# Altium PCB PD_PCB.PcbDoc
Units mm, origin at the board's own origin, x right, y up, seen from the top; angles counter-clockwise.
Board outline 60.05 x 60 mm, 2 copper layers (Top Layer, Bottom Layer); 42 components, 23 nets, 142 pads, 0 vias.
Unrouted connection lines stored in the file: 90.
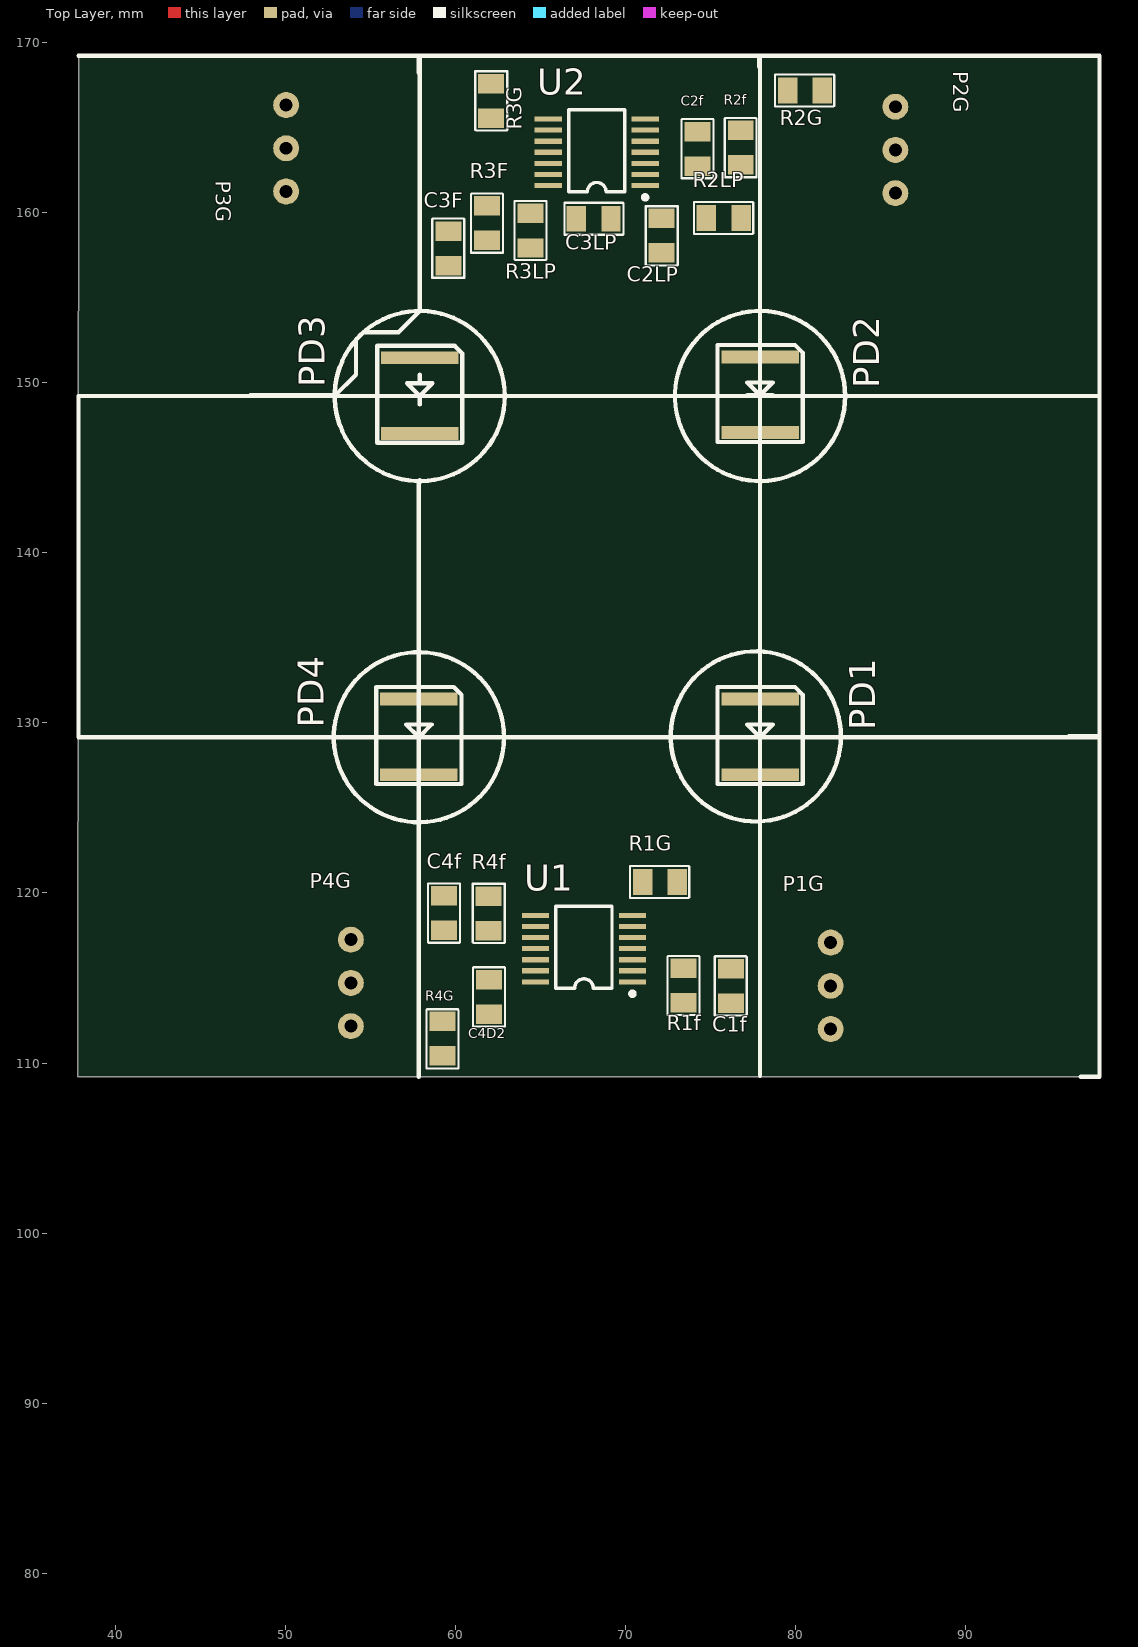
[diagram p0: Top Layer view]
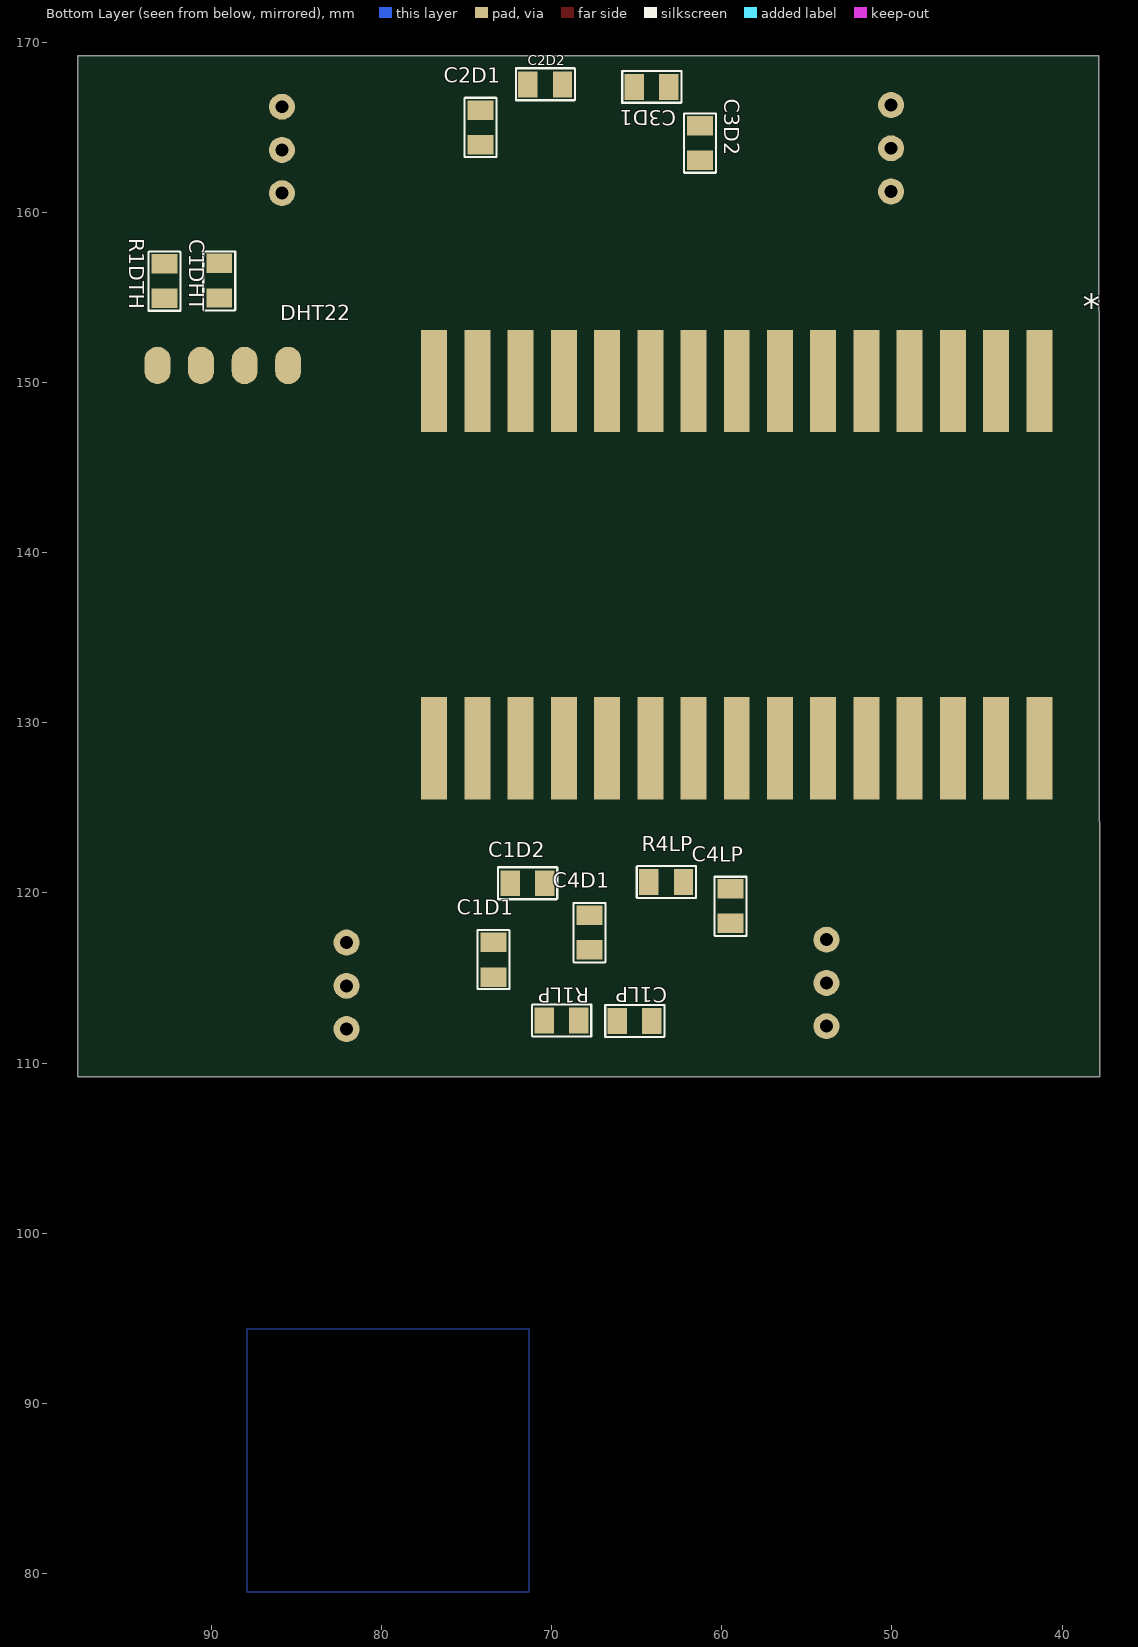
[diagram p1: Bottom Layer view, seen from below]

## Layer stack, top to bottom
Top Solder: solder mask 0.0102, Solder Resist, Dk 3.5
Top Layer: signal copper 0.0356
Dielectric 1: dielectric 0.32, FR-4, Dk 4.8
Bottom Layer: signal copper 0.0356
Bottom Solder: solder mask 0.0102, Solder Resist, Dk 3.5

## Board outline
37.85,169.2 97.85,169.2 97.85,109.2 37.8,109.2

## Design rules (kind name [scope] priority, off if disabled: settings)
Clearance [All] p1: gap=0.254 ignorepadtopadclearanceinfootprint=FALSE except(0: Arc-Hole Track-Hole SMDPad-Hole THPad-Hole Via-Hole Fill-Hole Poly-Hole Region-Hole Text-Hole)
PolygonConnect [All] p1: connectstyle=Relief reliefconductorwidth=0.254 reliefentries=4 polygonreliefangle="90 Angle" airgapwidth=0.254
RoomDefinition Sheet1 [InComponentClass('Sheet1')] p1: confinementstyle=ConfineIn formatcopy=TRUE lockcomponents=FALSE outline 0,0 50.8,0 50.8,25.4 0,25.4
RoomDefinition photodiodeAmplifier [InComponentClass('photodiodeAmplifier')] p2: confinementstyle=ConfineIn formatcopy=TRUE lockcomponents=FALSE outline 0,0 50.8,0 50.8,25.4 0,25.4
RoutingVias [All] p1: holewidth=0.711 width=1.27 viastyle="Through Hole" minholewidth=0.711 minwidth=1.27 maxholewidth=0.711 maxwidth=1.27
SolderMaskExpansion [All] p1: expansion=0.102 istentingtop=FALSE
Width [All] p1: maxlimit=0.254 minlimit=0.254 preferedwidth=0.254
30 further rules are at their usual default settings.

## Classes and differential pairs
component class Sheet1: * C1DHT DHT22 R1DTH
component class photodiodeAmplifier: C1D1 C1D2 C1f C1LP C2D1 C2D2 C2f C2LP C3D1 C3D2 C3F C3LP C4D1 C4D2 C4f C4LP P1G P2G P3G P4G PD1 PD2 PD3 PD4 R1f R1G R1LP R2f R2G R2LP R3F R3G R3LP R4f R4G R4LP U1 U2

## Components (designator, comment, footprint, x,y, rotation, side; value= is the part's Value field where it differs from the comment)
* "Arduino_Nano" "Arduino Nano SMD" 76.9,129.77 r90 bottom
C1D1 "100 nF" "CAP 0805" 73.6,115.95 r90 bottom value="5 pF"
C1D2 "100 nF" "CAP 0805" 71.55,120.75 r180 bottom value="5 pF"
C1DHT "100 nF" "CAP 0805" 89.35,156.1 r270 bottom value="5 pF"
C1f "100 nF" "CAP 0805" 76,114.4 r90 top value="5 pF"
C1LP "100 nF" "CAP 0805" 65.25,112.65 r180 bottom value="5 pF"
C2D1 "100 nF" "CAP 0805" 74.35,164.85 r90 bottom value="5 pF"
C2D2 "100 nF" "CAP 0805" 70.5,167.7 r180 bottom value="5 pF"
C2f "100 nF" "CAP 0805" 74.05,163.6 r90 top value="5 pF"
C2LP "100 nF" "CAP 0805" 72.3,158.75 r270 top value="5 pF"
C3D1 "100 nF" "CAP 0805" 64.25,167.55 r180 bottom value="5 pF"
C3D2 "100 nF" "CAP 0805" 61.1,164.2 r270 bottom value="5 pF"
C3F "100 nF" "CAP 0805" 59.4,157.75 r90 top value="5 pF"
C3LP "100 nF" "CAP 0805" 68,159.8 r0 top value="5 pF"
C4D1 "100 nF" "CAP 0805" 67.6,117.8 r270 bottom value="5 pF"
C4D2 "100 nF" "CAP 0805" 61.8,113.75 r90 top value="5 pF"
C4f "100 nF" "CAP 0805" 59.5,118.95 r270 top value="5 pF"
C4LP "100 nF" "CAP 0805" 59.3,119.35 r270 bottom value="5 pF"
DHT22 "DHT22" "DHT22 - 90deg SMD" 85.48,150.995 r270 bottom
P1G "Potentiometer Trimmer 90deg" "potentiometer trimmer straight" 82.05,112 r90 top
P2G "Potentiometer Trimmer 90deg" "potentiometer trimmer straight" 85.85,161.12 r90 top
P3G "Potentiometer Trimmer 90deg" "potentiometer trimmer straight" 50.05,161.22 r90 top
P4G "Potentiometer Trimmer 90deg" "potentiometer trimmer straight" 53.85,117.25 r270 top
PD1 "TEMD5080X01" "Photodiode SMD PKG-1" 77.9,131.4 r0 top
PD2 "TEMD5080X01" "Photodiode SMD PKG-1" 77.9,151.5 r0 top
PD3 "TEMD5080X01" "Photodiode SMD PKG-1" 57.9,151.45 r0 top
PD4 "TEMD5080X01" "Photodiode SMD PKG-1" 57.85,131.4 r0 top
R1DTH "RES 0805" "RES 0805" 93.063,156.956 r90 bottom value=10k
R1f "RES 0805" "RES 0805" 73.087,115.556 r90 top value=10k
R1G "RES 0805" "RES 0805" 73,120.95 r0 top value=10k
R1LP "RES 0805" "RES 0805" 70.406,112.187 r0 bottom value=10k
R2f "RES 0805" "RES 0805" 76.45,164.8 r90 top value=10k
R2G "RES 0805" "RES 0805" 81.524,167.463 r0 top value=10k
R2LP "RES 0805" "RES 0805" 76.756,159.963 r0 top value=10k
R3F "RES 0805" "RES 0805" 61.537,160.356 r90 top value=10k
R3G "RES 0805" "RES 0805" 62.413,165.544 r270 top value=10k
R3LP "RES 0805" "RES 0805" 64.713,157.926 r270 top value=10k
R4f "RES 0805" "RES 0805" 62.263,117.794 r270 top value=10k
R4G "RES 0805" "RES 0805" 58.937,112.424 r90 top value=10k
R4LP "RES 0805" "RES 0805" 64.256,120.337 r0 bottom value=10k
U1 "TSZ124" TSSOP14 67.55,117.7 r90 top
U2 "TSZ124" TSSOP14 68.3,164.5 r90 top

## Footprints (in the part's own frame and the unit in brackets; to place one, negate y for a bottom-side part, rotate by r counter-clockwise, add the part's x,y. Pads: shape width x height; smd on the part's side, far side on the other; paste and mask are expansions set on the pad)
"Arduino Nano SMD" [mm]
  rect 6x1.524 smd: 1(-1.27,0) 2(-1.27,-2.54) 3(-1.27,-5.08) 4(-1.27,-7.62) 5(-1.27,-10.16) 6(-1.27,-12.7) 7(-1.27,-15.24) 8(-1.27,-20.32) 8(-1.27,-17.78) 10(-1.27,-22.86) 11(-1.27,-25.4) 12(-1.27,-27.94) 13(-1.27,-30.48) 14(-1.27,-33.02) 15(-1.27,-35.56) 16(20.32,-35.56) 17(20.32,-33.02) 18(20.32,-30.48) 19(20.32,-27.94) 20(20.32,-25.4) 21(20.32,-22.86) 22(20.32,-20.32) 23(20.32,-17.78) 24(20.32,-15.24) 25(20.32,-12.7) 26(20.32,-10.16) 27(20.32,-7.62) 28(20.32,-5.08) 29(20.32,-2.54) 30(20.32,0)
  body extent -1.81,-39.37 22.13,3.81, height 5.5
"CAP 0805" [mil]
  rect 45x60 smd: 1(44.84,-7.2) 2(-35.16,-7.2)
  silkscreen extent -63,-44 74,30, body extent -35,-32 44,17, height 31
"DHT22 - 90deg SMD" [mm]
  oval 2.2x1.524 smd: 1(0,0) 2(0,-2.56) 3(-0.005,-5.12) 4(-0.005,-7.68)
  body extent -1.85,-11.6 25.89,3.7, height 7.8
"Photodiode SMD PKG-1" [mm] "package type 1 -"
  rect 4.55x0.75 smd: 1(0,0) 2(0,-4.45)
  silkscreen extent -2.5,-5 2.5,0.7, body extent -2.15,-4.75 2.05,0.25, height 1.12
"potentiometer trimmer straight" [mil]
  round 60 hole 30: 1(0,0) 2(100,0) 3(200,0)
  body extent -87,-95 288,111, height 460
"RES 0805" [mil]
  rect 45x60 smd: 1(1.02,-12.32) 2(-78.98,-12.32)
  silkscreen extent -108,-49 29,25, body extent -84,-39 6,14, height 30
TSSOP14 [mm] "Shrink Small Outline; 14 Leads; Body Width 4.4 mm; Pitch 0.65 mm"
  rect 0.3x1.6 smd: 1(-2.925,-2.85) 2(-2.275,-2.85) 3(-1.625,-2.85) 4(-0.975,-2.85) 5(-0.325,-2.85) 6(0.325,-2.85) 7(0.975,-2.85) 8(0.975,2.85) 9(0.325,2.85) 10(-0.325,2.85) 11(-0.975,2.85) 12(-1.625,2.85) 13(-2.275,2.85) 14(-2.925,2.85)
  silkscreen extent -3.75,-2.97 1.52,1.65, body extent -3.43,-1.91 1.65,1.91, height 1.2

## Part data
C1D1 C1D2 C1DHT C1f C1LP C2D1 C2D2 C2f C2LP C3D1 C3D2 C3F C3LP C4D1 C4D2 C4f C4LP: library part "CAP 0805"
PD1 PD2 PD3 PD4: "PIN Sillicium photodiode."
R1DTH R1f R1G R1LP R2f R2G R2LP R3F R3G R3LP R4f R4G R4LP: "SMD Resistor 0805"

## Nets (pads, with @x,y where several pads share a name; then routed paths per layer and width w, separated by ;. In a path a pad name is that pad's centre, name@x,y a point inside that pad or via, vN(x,y) a via of type N, cw(c..) or ccw(c..) an arc to the next point about the centre after c; other vN are vias at no path point)
GND: C1D1.1 C1DHT.1 C1LP.1 C2D1.1 C2LP.1 C3D1.1 C3LP.1 C4D1.1 C4LP.1 DHT22.4 PD1.1 PD2.1 PD3.1 PD4.1 R1G.2 R2G.2 R3G.2 R4G.2 U1.3 U1.10 U1.11 U2.3 U2.10 U2.11
Net*_4: *.4 DHT22.2 R1DTH.2
NetC1D1_2: C1D1.2 C1f.1 PD1.2 R1f.1 U1.2
NetC1D2_1: C1D2.1 C1LP.2 R1LP.2 U1.5
NetC1D2_2: C1D2.2 P1G.3 R1G.1 U1.6
NetC1f_2: C1f.2 R1f.2 R1LP.1 U1.1
NetC2D1_2: C2D1.2 C2f.1 PD2.2 R2f.1 U2.2
NetC2D2_1: C2D2.1 C2LP.2 R2LP.2 U2.5
NetC2D2_2: C2D2.2 P2G.3 R2G.1 U2.6
NetC2f_2: C2f.2 R2f.2 R2LP.1 U2.1
NetC3D1_2: C3D1.2 C3F.1 PD3.2 R3F.1 U2.9
NetC3D2_1: C3D2.1 C3LP.2 R3LP.2 U2.12
NetC3D2_2: C3D2.2 P3G.3 R3G.1 U2.13
NetC3F_2: C3F.2 R3F.2 R3LP.1 U2.8
NetC4D1_2: C4D1.2 C4f.1 PD4.2 R4f.1 U1.9
NetC4D2_1: C4D2.1 C4LP.2 R4LP.2 U1.12
NetC4D2_2: C4D2.2 P4G.3 R4G.1 U1.13
NetC4f_2: C4f.2 R4f.2 R4LP.1 U1.8
NetP1G_1: P1G.1 P1G.2 U1.7
NetP2G_1: P2G.1 P2G.2 U2.7
NetP3G_1: P3G.1 P3G.2 U2.14
NetP4G_1: P4G.1 P4G.2 U1.14
VCC: *.26 C1DHT.2 DHT22.1 R1DTH.1 U1.4 U2.4
pads on no net: *.1 *.2 *.3 *.5 *.6 *.7 *.8 *.10 *.11 *.12 *.13 *.14 *.15 *.16 *.17 *.18 *.19 *.20 *.21 *.22 *.23 *.24 *.25 *.27 *.28 *.29 *.30 DHT22.3

## Polygon pours and split planes (outlines as drawn)
GND on Bottom Layer "NONET_L02_P000" (solid, shelved, pour order 0): 71.35,78.9 87.9,78.9 87.9,94.4 71.35,94.4

## Silkscreen, mask and mechanical layers (free items; w line width, h text height)
Top Overlay:
  circle w0.254: c57.85,129.15 r5
  circle w0.254: c57.9,149.2 r5
  circle w0.254: c77.65,129.2 r5
  circle w0.254: c77.9,149.2 r5
  lines w0.254: 37.85,169.2 57.85,169.2 ; 47.95,149.25 52.9,149.25 ; 52.9,149.2 54.15,150.45 54.15,152.5 54.6,152.95 56.65,152.95 57.9,154.2 57.9,169.2 ; 57.85,109.2 57.85,144.2 57.9,144.25 ; 62.9,149.2 72.9,149.2 77.9,149.2 85.4,149.2 ; 77.9,109.25 77.9,169.2 77.9,150.45 ; 86.1,149.2 96.25,149.2 ; 57.85,169.2 77.85,169.2 ; 57.85,169.2 57.85,168.2 57.85,169.2 ; 77.85,169.2 97.85,169.2 97.85,149.2 ; 77.85,169.2 77.85,168.55 77.85,169.2 ; 96.25,149.2 97.85,149.2 ; 96.25,149.2 97.85,149.2 ; 97.85,109.2 97.85,129.2 ; 97.85,109.2 96.75,109.2 97.85,109.2 ; 97.85,129.2 97.85,149.2 ; 97.85,129.2 96.05,129.2 97.85,129.2 ; 97.85,149.2 97.85,129.15 87.95,129.15 57.85,129.15 47.9,129.15 37.85,129.15 37.85,149.2 47.95,149.2 97.85,149.2